# Altium PCB mcu增高基板.PcbDoc
Units mm, origin at the board's own origin, x right, y up, seen from the top; angles counter-clockwise.
Board outline 22.6 x 24.36 mm, 2 copper layers (Top Layer, Bottom Layer), stack 1.571 mm thick; 3 components, 6 nets, 48 pads, 0 vias.
Unrouted connection lines stored in the file: 42.
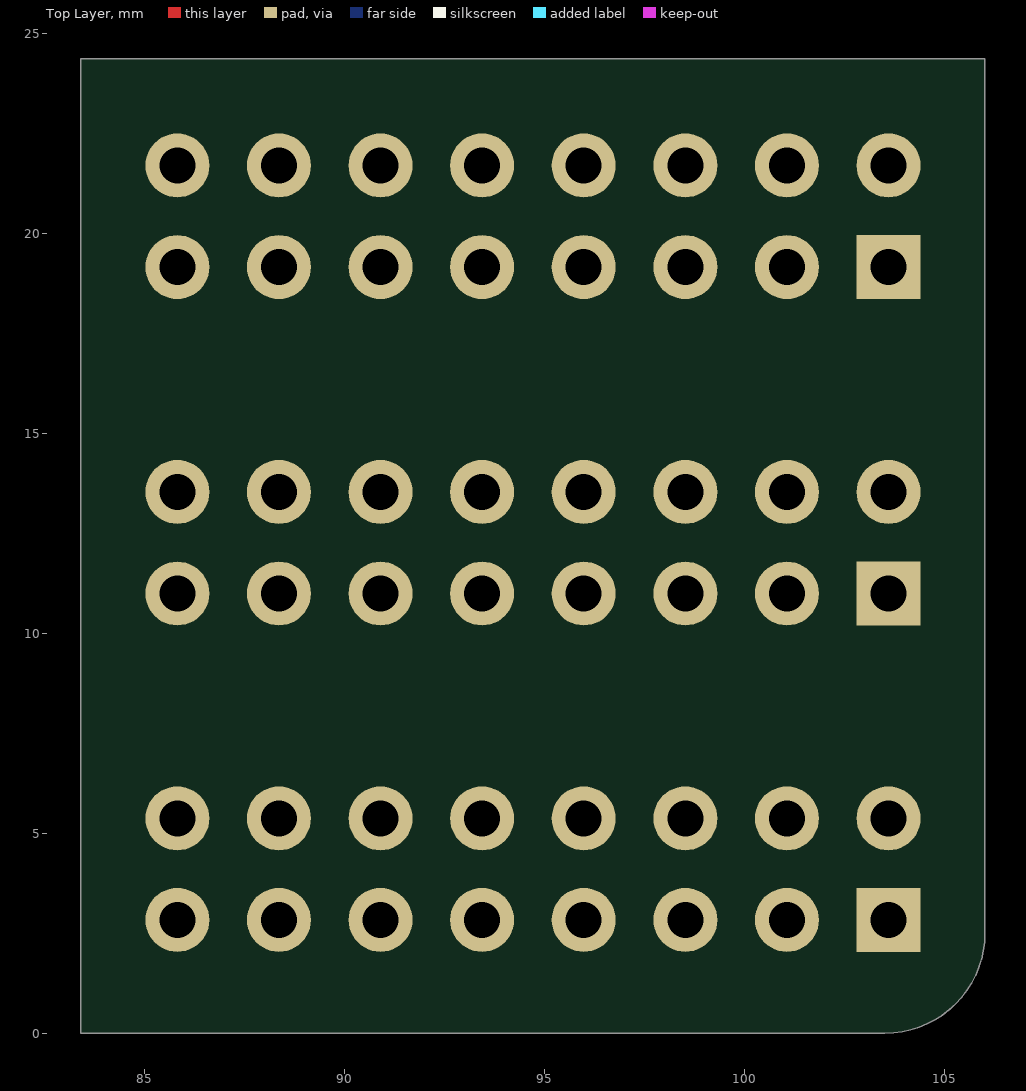
[diagram p0: Top Layer view]
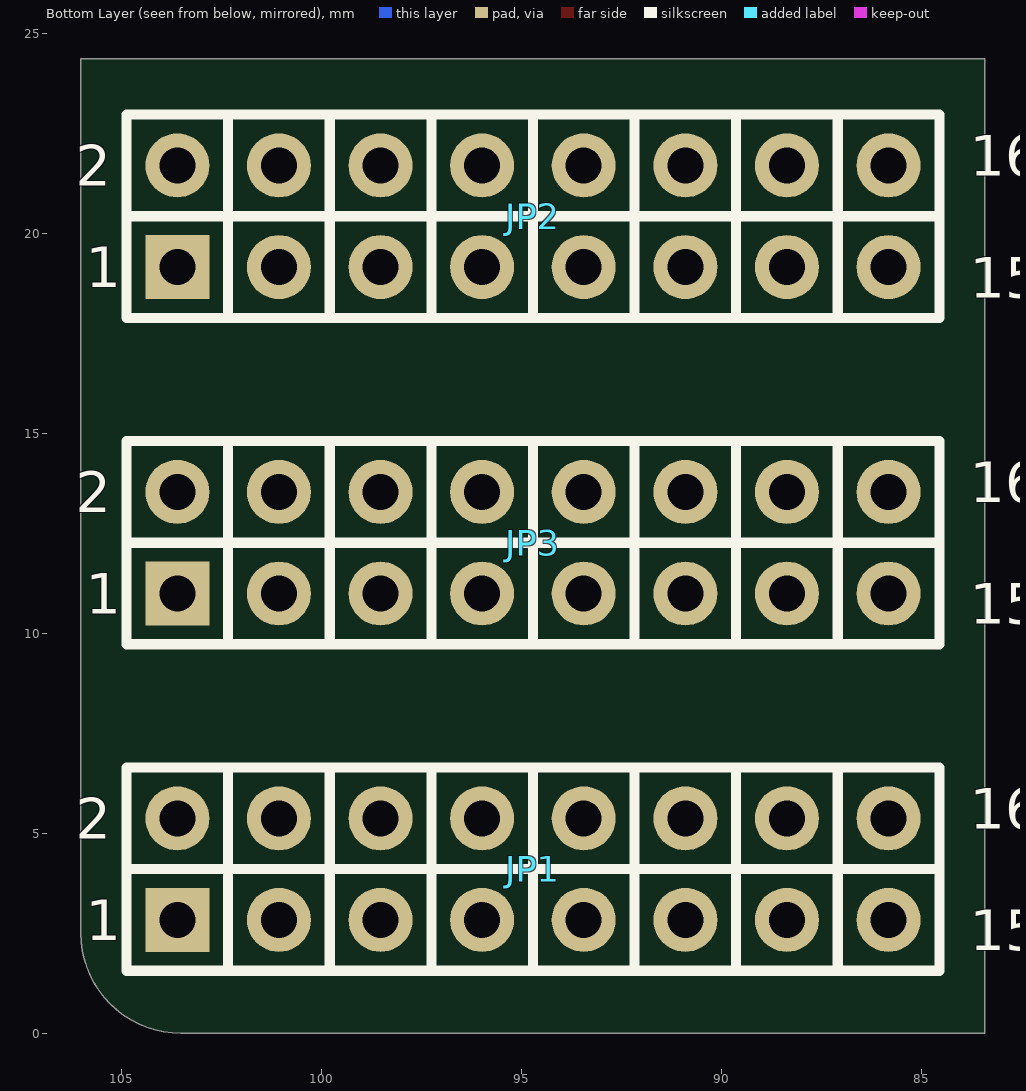
[diagram p1: Bottom Layer view, seen from below]

## Layer stack, top to bottom
Top Solder: solder mask 0.0102, Solder Resist, Dk 3.5
Top Layer: signal copper 0.0356
Dielectric 1: dielectric 1.5, FR-4, Dk 4.8
Bottom Layer: signal copper 0.0356
Bottom Solder: solder mask 0.0102, Solder Resist, Dk 3.5

## Board outline
83.406,0.006 83.406,24.364 106.006,24.364 106.006,2.506 cw(c103.503,2.509) 103.506,0.006

## Design rules (kind name [scope] priority, off if disabled: settings)
Clearance [All] p1: gap=0.254 ignorepadtopadclearanceinfootprint=FALSE except(0: Arc-Hole Track-Hole SMDPad-Hole THPad-Hole Via-Hole Fill-Hole Poly-Hole Region-Hole Text-Hole)
PolygonConnect [All] p1: connectstyle=Relief reliefconductorwidth=0.254 reliefentries=4 polygonreliefangle="90 Angle" airgapwidth=0.254
RoutingVias [All] p1: holewidth=0.711 width=1.27 viastyle="Through Hole" minholewidth=0.711 minwidth=1.27 maxholewidth=0.711 maxwidth=1.27
SolderMaskExpansion [All] p1: expansion=0.102 istentingtop=FALSE
Width [All] p1: maxlimit=0.254 minlimit=0.254 preferedwidth=0.254
30 further rules are at their usual default settings.

## Components (designator, comment, footprint, x,y, rotation, side; value= is the part's Value field where it differs from the comment)
JP1 "Header 8X2" HDR2.54-LI-2x8P 94.706,4.109 r180 bottom
JP2 "Header 8X2" HDR2.54-LI-2x8P 94.706,20.431 r180 bottom
JP3 "Header 8X2" HDR2.54-LI-2x8P 94.706,12.27 r180 bottom

## Footprints (in the part's own frame and the unit in brackets; to place one, negate y for a bottom-side part, rotate by r counter-clockwise, add the part's x,y. Pads: shape width x height; smd on the part's side, far side on the other; paste and mask are expansions set on the pad)
HDR2.54-LI-2x8P [mm] "双排排针，8x2脚"
  rect 1.6x1.6 hole 0.9: 1(-8.89,-1.27)
  round 1.6 hole 0.9: 2(-8.89,1.27) 3(-6.35,-1.27) 4(-6.35,1.27) 5(-3.81,-1.27) 6(-3.81,1.27) 7(-1.27,-1.27) 8(-1.27,1.27) 9(1.27,-1.27) 10(1.27,1.27) 11(3.81,-1.27) 12(3.81,1.27) 13(6.35,-1.27) 14(6.35,1.27) 15(8.89,-1.27) 16(8.89,1.27)
  silkscreen extent -10.16,-2.54 10.16,2.54, body extent -10.16,-2.54 10.16,2.54, height 8.5

## Part data
JP1 JP2 JP3: "8*2P接插件", BOM名称=8*2P接插件, 学习资源=www.ooocke.com, 版权归属=源创客

## Nets (pads, with @x,y where several pads share a name; then routed paths per layer and width w, separated by ;. In a path a pad name is that pad's centre, name@x,y a point inside that pad or via, vN(x,y) a via of type N, cw(c..) or ccw(c..) an arc to the next point about the centre after c; other vN are vias at no path point)
EN-LM5143: JP1.16
INA226-A: JP1.2
INA226-B: JP1.14
PGND: JP1.1 JP1.3 JP1.5 JP1.7 JP2.1 JP2.2 JP2.3 JP2.4 JP2.5 JP2.6 JP2.7 JP2.8 JP3.1 JP3.2 JP3.3 JP3.4 JP3.5 JP3.6 JP3.7 JP3.8
VBUS: JP1.4 JP1.6 JP1.8 JP1.10 JP1.12
VOUT12V: JP1.9 JP1.11 JP1.13 JP1.15 JP2.9 JP2.10 JP2.11 JP2.12 JP2.13 JP2.14 JP2.15 JP2.16 JP3.9 JP3.10 JP3.11 JP3.12 JP3.13 JP3.14 JP3.15 JP3.16

## Silkscreen, mask and mechanical layers (free items; w line width, h text height)
Mechanical 1:
  the board outline again, w0.013

## Text inside footprints (layer, text, board x,y; h text height)
JP1: Bottom Overlay "2" at 106.136,4.871 h1.02; Bottom Overlay "1" at 105.882,2.331 h1.02; Bottom Overlay "16" at 83.784,5.125 h1.02; Bottom Overlay "15" at 83.784,2.077 h1.02
JP2: Bottom Overlay "2" at 106.136,21.193 h1.02; Bottom Overlay "1" at 105.882,18.653 h1.02; Bottom Overlay "16" at 83.784,21.447 h1.02; Bottom Overlay "15" at 83.784,18.399 h1.02
JP3: Bottom Overlay "2" at 106.136,13.032 h1.02; Bottom Overlay "1" at 105.882,10.492 h1.02; Bottom Overlay "16" at 83.784,13.286 h1.02; Bottom Overlay "15" at 83.784,10.238 h1.02